# Altium PCB OLED_1.5-inch_Pcb.PcbDoc
Units mil, origin at the board's own origin, x right, y up, seen from the top; angles counter-clockwise.
Board outline 1811.02 x 1417.32 mil, 2 copper layers (Top Layer, Bottom Layer), stack 49.606 mil thick; 24 components, 17 nets, 99 pads, 7 vias.
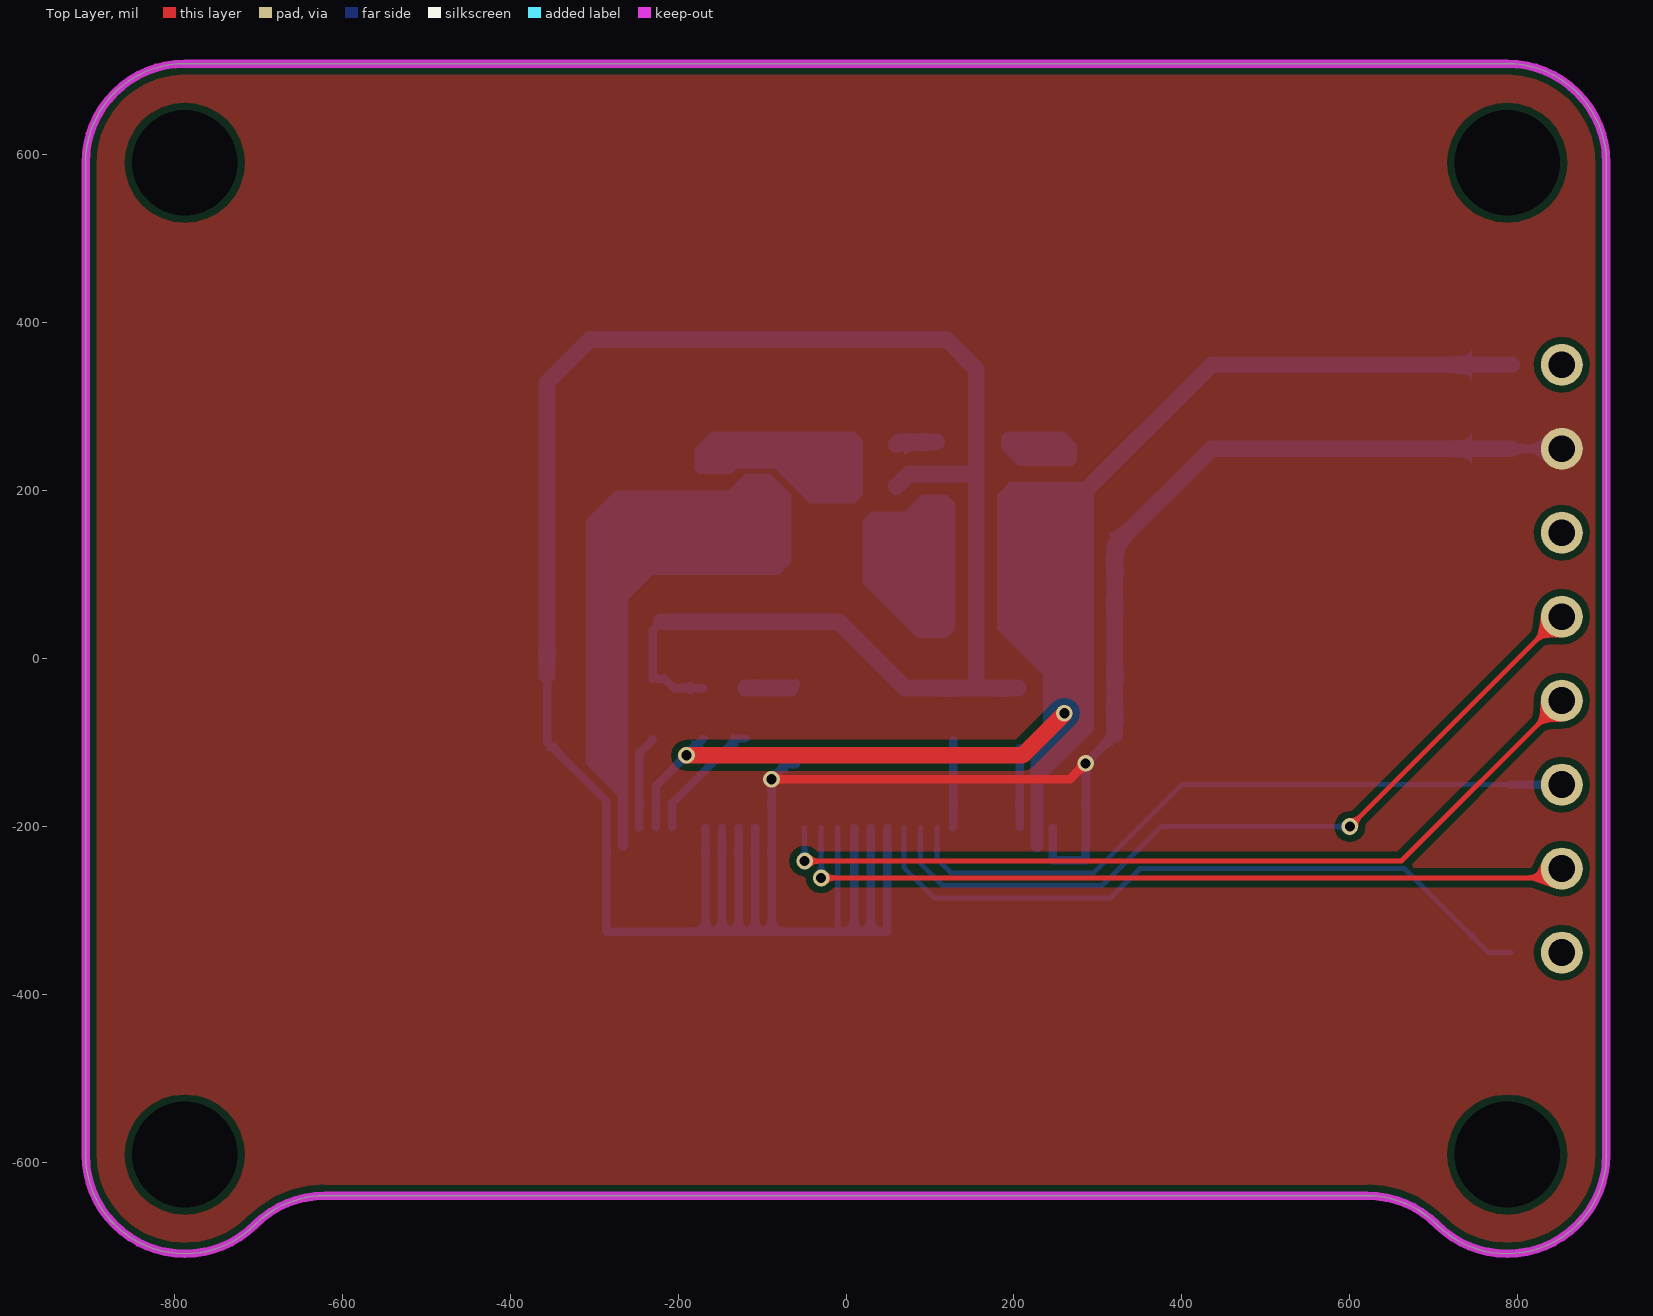
[diagram p0: Top Layer view]
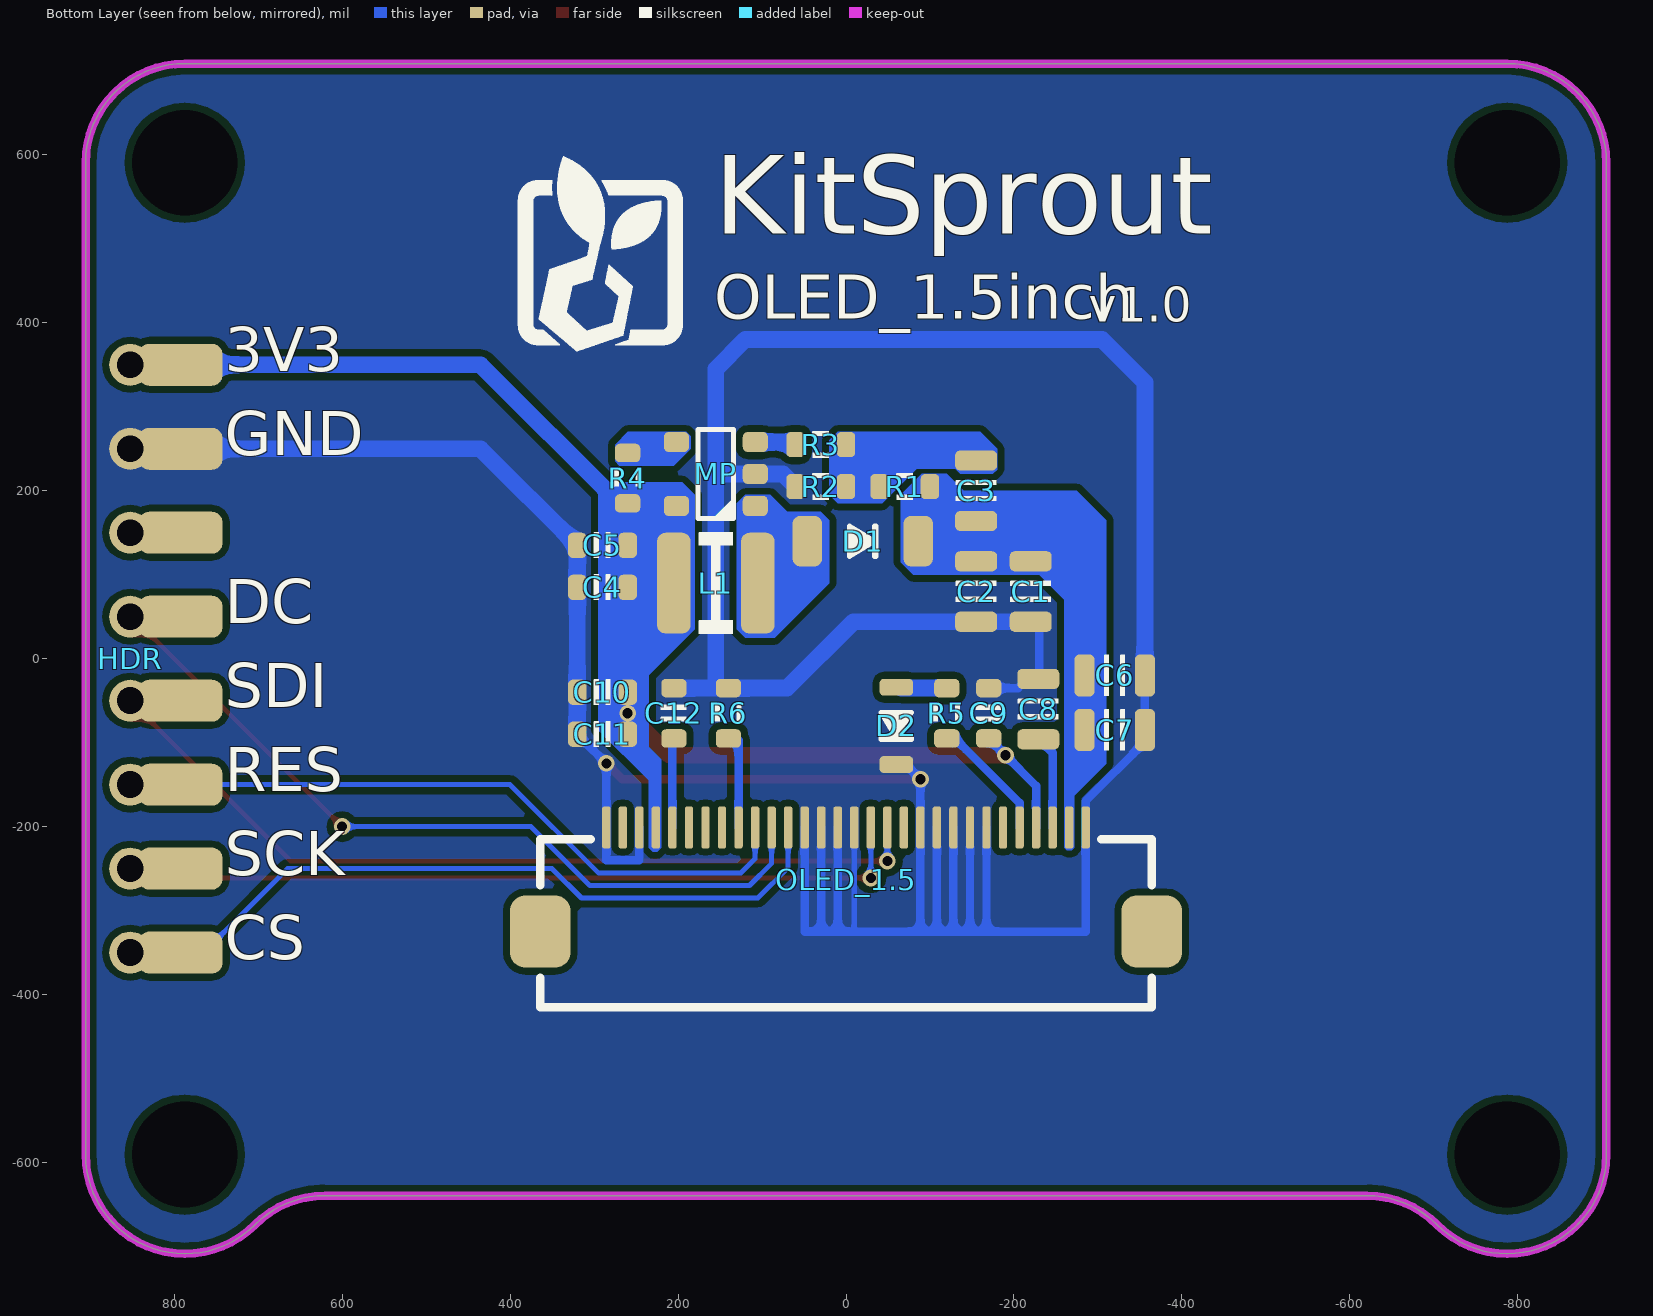
[diagram p1: Bottom Layer view, seen from below]
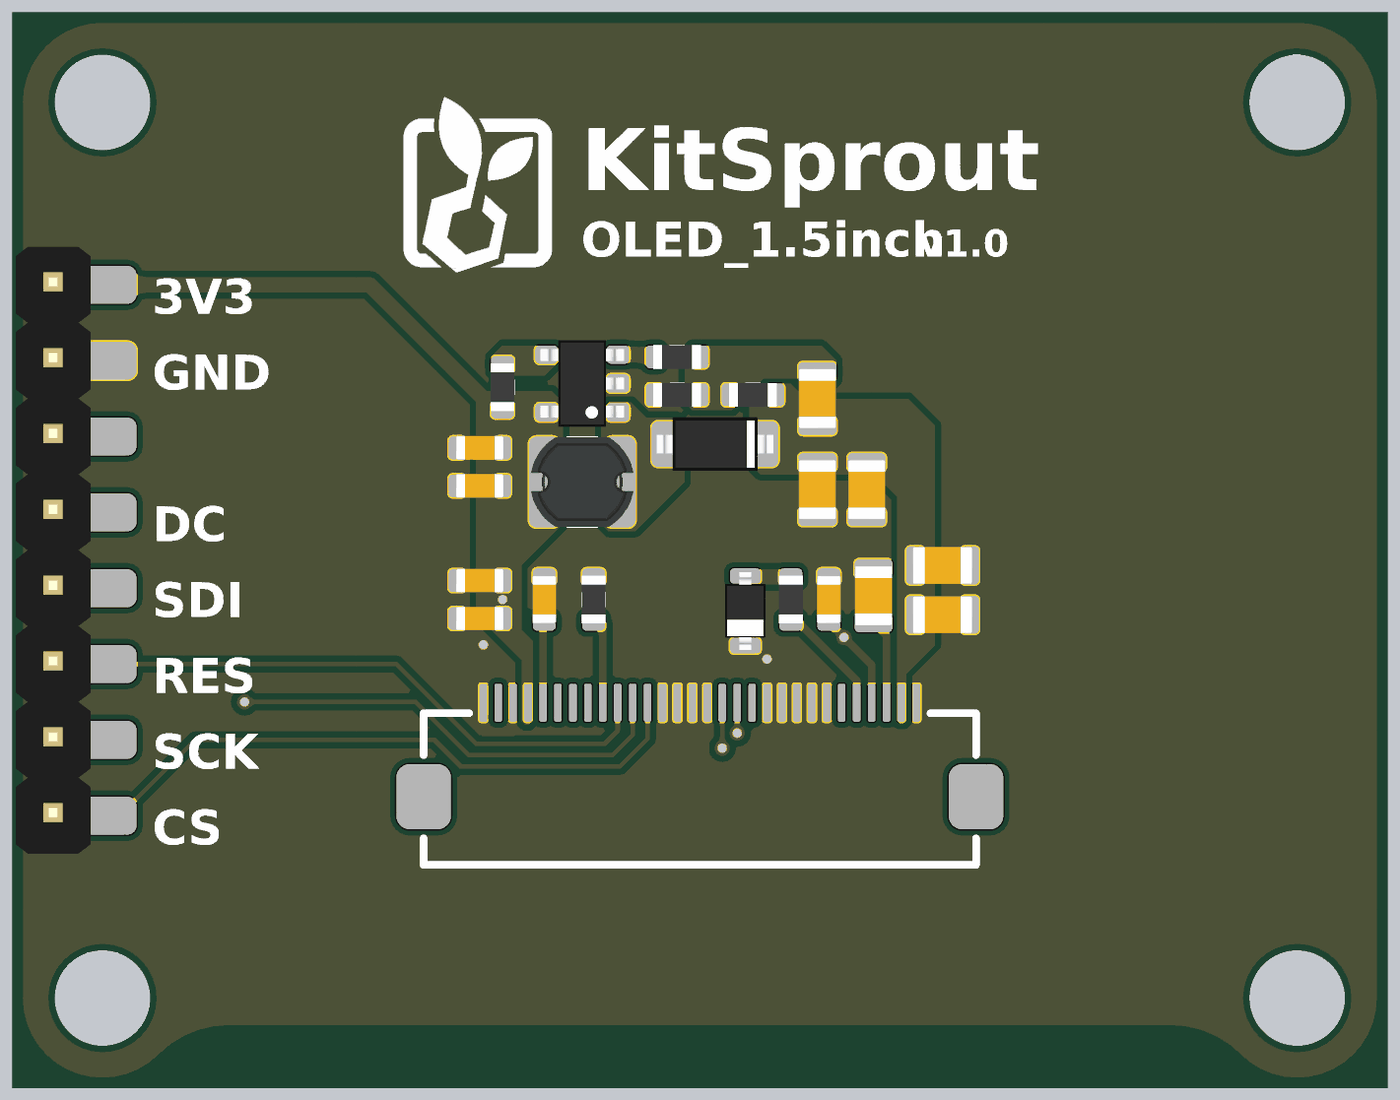
[diagram p2: 3D render of the assembled board from below, using the file's embedded part models]

## Layer stack, top to bottom
Top Solder: solder mask 0.3937, Solder Resist, Dk 3.5
Top Layer: signal copper 1.1811
Dielectric 1: dielectric 47.2441, FR-4, Dk 4.8
Bottom Layer: signal copper 1.1811
Bottom Solder: solder mask 0.3937, Solder Resist, Dk 3.5

## Board outline
-905.51,-590.55 ccw(c-787.4,-590.55) -787.4,-708.66 ccw(c-787.4,-590.55) -703.89,-674.07 cw(c-620.37,-757.58) -620.37,-639.47 620.37,-639.47 cw(c620.37,-757.58) 703.89,-674.07 ccw(c787.4,-590.55) 787.4,-708.66 ccw(c787.4,-590.55) 905.51,-590.55 905.51,590.55 ccw(c787.4,590.55) 787.4,708.66 -787.4,708.66 ccw(c-787.4,590.55) -905.51,590.55

## Design rules (kind name [scope] priority, off if disabled: settings)
BoardOutlineClearance [All] p1: gap=10 ignorepadtopadclearanceinfootprint=FALSE except(0: Arc-SplitContinuation Track-SplitContinuation SMDPad-SplitContinuation THPad-SplitContinuation Via-SplitContinuation Fill-SplitContinuation Poly-SplitContinuation Region-SplitContinuation Text-SplitContinuation)
Clearance ClearancePolygon [InPolygon] p1: gap=8 ignorepadtopadclearanceinfootprint=FALSE except(0: Arc-Hole Track-Hole SMDPad-Hole THPad-Hole Via-Hole Fill-Hole Poly-Hole Region-Hole Text-Hole)
Clearance [All] p2: gap=6 ignorepadtopadclearanceinfootprint=FALSE except(0: Arc-Hole Track-Hole SMDPad-Hole THPad-Hole Via-Hole Fill-Hole Poly-Hole Region-Hole Text-Hole)
ComponentClearance [All] p1: gap=0 collisioncheckmode=3 verticalgap=0 showdistances=FALSE
Height [All] p1: minheight=0 maxheight=5000 prefheight=500
HoleSize [All] p1: absolutevalues=TRUE maxlimit=200 minlimit=1 maxpercent=80.000 minpercent=20.000
HoleToHoleClearance [All] p1: gap=6 allowstackedmicrovias=TRUE
MinimumAnnularRing [All] p1: minimumring=4
MinimumSolderMaskSliver [All] p1: minsoldermaskwidth=0
PolygonConnect [All] p1: connectstyle=Direct reliefconductorwidth=10 reliefentries=4 polygonreliefangle="90 Angle" airgapwidth=10
RoutingVias [All] p1: holewidth=12 width=24 viastyle="Through Hole" minholewidth=12 minwidth=20 maxholewidth=28 maxwidth=50
SilkToSilkClearance [All] p1: silktosilkclearance=0
SilkToSolderMaskClearance [IsPad] p1: minsilkscreentomaskgap=0 clearancetoexposedcopper=TRUE
SolderMaskExpansion [All] p1: expansion=2
Width [All] p1: maxlimit=100 minlimit=6 preferedwidth=10
23 further rules are at their usual default settings.

## Components (designator, comment, footprint, x,y, rotation, side; value= is the part's Value field where it differs from the comment)
C1 "Cap_0805" CAP_0805 -220,80 r90 bottom value=10u
C2 "Cap_0805" CAP_0805 -155,80 r90 bottom value=1u
C3 "Cap_0805" CAP_0805 -155,200 r270 bottom value=0.1u
C4 "Cap_0603" CAP_0603 290,85 r180 bottom value=0.1u
C5 "Cap_0603" CAP_0603 290,135 r180 bottom value=10u
C6 "Cap_0805" CAP_0805 -320,-20 r0 bottom value=4.7u
C7 "Cap_0805" CAP_0805 -320,-85 r0 bottom value=0.1u
C8 "Cap_0805" CAP_0805 -229,-60 r270 bottom value=4.7u
C9 "Cap_0603" CAP_0603 -170,-65 r270 bottom value=10u
C10 "Cap_0603" CAP_0603 290,-40 r180 bottom value=4.7u
C11 "Cap_0603" CAP_0603 290,-90 r180 bottom value=1u
C12 "Cap_0603" CAP_0603 205,-65 r270 bottom value=0.1u
D1 "Diode" SOD-123 -20,140 r180 bottom value=1N5819
D2 "Diode" SOD-323 -60,-80 r270 bottom value=1N4148
HDR "HDR1x8_2.54" HDR1X8_2.54_180 852.4,350 r180 bottom
L1 "Ind_CD32" IND_CD32 155,90 r0 bottom value=10u
MP "MP1541" SOT23-5 155,220 r0 bottom
OLED_1.5 "OLED_1.5_SSD1351" OLED_1.5_128x128_SSD1351 0,39.37 r0 top locked
R1 "Res_0603" RES_0603 -70,205 r180 bottom value=100K
R2 "Res_0603" RES_0603 30,205 r180 bottom value=13K
R3 "Res_0603" RES_0603 30,255 r180 bottom value=100K
R4 "Res_0603" RES_0603 260,215 r270 bottom value=10K
R5 "Res_0603" RES_0603 -120,-65 r90 bottom value=50R
R6 "Res_0603" RES_0603 140,-65 r90 bottom value=560K

## Footprints (in the part's own frame and the unit in brackets; to place one, negate y for a bottom-side part, rotate by r counter-clockwise, add the part's x,y. Pads: shape width x height; smd on the part's side, far side on the other; paste and mask are expansions set on the pad)
CAP_0603 [mil]
  rrect50% 22x30 smd: 1(-30,0) 2(30,0)
  silkscreen extent -10,-15 10,15, body extent -31,-16 31,16, height 31
CAP_0805 [mil]
  rrect50% 24x50 smd: 1(-36,0) 2(36,0)
  silkscreen extent -12,-24 12,24, body extent -39,-25 39,25, height 39
HDR1X8_2.54_180 [mil]
  round 50 hole 32: 1(0,0) 2(0,-100) 3(0,-200) 4(0,-300) 5(0,-400) 6(0,-500) 7(0,-600) 8(0,-700)
  body extent -49,-750 49,50, height 323
IND_CD32 [mil]
  rrect50% 40x120 smd: 1(-50,0) 2(50,0)
  silkscreen extent -20,-60 20,60, body extent -68,-59 68,59, height 83
OLED_1.5_128x128_SSD1351 [mil]
  rrect50% 72x86 smd far side: 0(-364.06,-364.37) 0(364.05,-364.37)
  rrect50% 10x50 smd far side: 1(-285.43,-240.39) 2(-265.75,-240.39) 3(-246.06,-240.39) 4(-226.38,-240.39) 5(-206.69,-240.39) 6(-187.01,-240.39) 7(-167.32,-240.39) 8(-147.64,-240.39) 9(-127.95,-240.39) 10(-108.27,-240.39) 11(-88.58,-240.39) 12(-68.9,-240.39) 13(-49.21,-240.39) 14(-29.53,-240.39) 15(-9.84,-240.39) 16(9.84,-240.39) 17(29.53,-240.39) 18(49.21,-240.39) 19(68.9,-240.39) 20(88.58,-240.39) 21(108.27,-240.39) 22(127.95,-240.39) 23(147.64,-240.39) 24(167.32,-240.39) 25(187.01,-240.39) 26(206.69,-240.39) 27(226.38,-240.39) 28(246.06,-240.39) 29(265.75,-240.39) 30(285.43,-240.39)
  body extent -669,-669 669,669, height 63
RES_0603 [mil]
  rrect50% 22x30 smd: 1(-30,0) 2(30,0)
  silkscreen extent -10,-16 10,16, body extent -31,-16 31,16, height 18
SOD-123 [mil]
  rrect50% 35x60 smd: 1(-66,0) 2(66,0)
  silkscreen extent -16,-18 16,18, body extent -77,-35 77,35, height 46
SOD-323 [mil]
  rrect50% 20x40 smd: 1(-46,0) 2(46,0)
  silkscreen extent -16,-18 16,18, body extent -51,-27 51,27, height 43
SOT23-5 [mil]
  rrect50% 30x24 smd: 1(-47,38) 2(-47,0) 3(-47,-38) 4(47,-38) 5(47,38)
  silkscreen extent -21,-53 21,53, body extent -55,-57 55,57, height 57

## Part data
C1 C2 C3 C4 C5 C6 C7 C8 C9 C10 C11 C12: "Capacitor"
D1: library part Diode_SOD123
D2: library part Diode_SOD323
HDR: "Header"
L1: "Inductor"
MP: "Boost"
OLED_1.5: "OLED"
R1 R2 R3 R4 R5 R6: "Resistor"

## Free pads (board coordinates)
  round 114.17 hole 126 unplated paste+0 mask+0: 0(-787.4,-590.55) 0(-787.4,590.55) 0(787.4,-590.55) 0(787.4,590.55)
  rrect50% 100x50 smd far side: 1(792.4,350) 2(792.4,250) 3(792.4,150) 4(792.4,50) 5(792.4,-50) 6(792.4,-150) 7(792.4,-250) 8(792.4,-350)

## Via types
v1: diameter 20, hole 12, Top Layer to Bottom Layer, 7 vias

## Nets (pads, with @x,y where several pads share a name; then routed paths per layer and width w, separated by ;. In a path a pad name is that pad's centre, name@x,y a point inside that pad or via, vN(x,y) a via of type N, cw(c..) or ccw(c..) an arc to the next point about the centre after c; other vN are vias at no path point)
3V3: C4.2 C5.2 C9.2 C10.2 C11.2 HDR.1 L1.2 MP.5 OLED_1.5.4 OLED_1.5.27 pad.1 R4.2 | length 1712.3
  Top Layer w20: v1(-190,-115) 210,-115 v1(260,-65)
  Bottom Layer w10: OLED_1.5.4 -226.38,-151.38 v1(-190,-115) C9.2 ; OLED_1.5.27 226.38,-128.62 C11.2@262.5,-92.5
  Bottom Layer w20: MP.5@202,185 R4.2 ; L1.2@205,85 C4.2 ; C11.2 v1(260,-65) C10.2 C4.2 ; pad.1 435,350 270,185 R4.2 ; C4.2 C5.2 R4.2
CS: HDR.8 OLED_1.5.19 pad.8 | length 842.3
  Bottom Layer w6: OLED_1.5.19 68.9,-248.9 105,-285 315,-285 350,-250 665,-250 765,-350 pad.8
DC: HDR.4 OLED_1.5.20 pad.4 | length 949.9
  Top Layer w6: v1(600,-200) 850,50 HDR.4
  Bottom Layer w6: OLED_1.5.20 88.58,-243.58 115,-270 305,-270 375,-200 v1(600,-200)
GND: C1.1 C2.1 C4.1 C5.1 C6.1 C7.1 C8.1 C9.1 C10.1 C11.1 C12.1 D2.2 HDR.2 MP.2 OLED_1.5.1 OLED_1.5.7 OLED_1.5.8 OLED_1.5.9 OLED_1.5.10 OLED_1.5.11 OLED_1.5.15 OLED_1.5.16 OLED_1.5.17 OLED_1.5.18 OLED_1.5.28 OLED_1.5.30 pad.2 R2.1 R6.2 | length 5278.8
  Top Layer w10: v1(-88.58,-143.58) 266.42,-143.58 v1(285.43,-124.57)
  Bottom Layer w6: -9.84,-325 OLED_1.5.15
  Bottom Layer w10: C6.1 -356,-99 -285.43,-169.57 OLED_1.5.1 -285.43,-325 -167.32,-325 ; C1.1 -230,34 -230,-24 -216,-24 -205,-35 C9.1 ; OLED_1.5.7 -167.32,-325 ; OLED_1.5.8 -147.64,-325 ; OLED_1.5.9 -127.95,-325 ; OLED_1.5.10 -108.27,-325 ; D2.2 -71,-126 v1(-88.58,-143.58) OLED_1.5.11 -88.58,-325 ; OLED_1.5.16 9.84,-325 ; OLED_1.5.17 29.53,-325 ; OLED_1.5.18 49.21,-325 29.53,-325 ; OLED_1.5.28 246.06,-240 285.43,-240 OLED_1.5.30 v1(285.43,-124.57) C11.1 ; pad.2 HDR.2 ; -167.32,-325 -147.64,-325 ; -147.64,-325 -127.95,-325 ; -127.95,-325 -108.27,-325 ; -108.27,-325 -88.58,-325 ; -88.58,-325 -9.84,-325 9.84,-325 ; 9.84,-325 29.53,-325
  Bottom Layer w20: C6.1 -356,329 -305,380 120,380 155,345 155,220 ; C1.1 -9,44 70,-35 R6.2 155,-35 ; R2.1 75,220 155,220 ; C12.1 155,-35 ; C11.1 C10.1 C4.1 C5.1 435,250 pad.2 ; 155,-35 155,220
NetC3_1: C3.1 R1.1 R2.2 R3.2 | length 217.8
  Bottom Layer w20: C3.1 -71,236 R1.1 R2.2 R3.2
NetC8_2: C8.2 OLED_1.5.3 | length 111.7
  Bottom Layer w10: OLED_1.5.3 -246.06,-112.06 C8.2@-230,-96
NetC12_2: C12.2 OLED_1.5.26 | length 94.3
  Bottom Layer w10: OLED_1.5.26 206.69,-106.69
NetD1_1: D1.1 L1.1 MP.1 | length 102.2
  Bottom Layer w20: D1.1 105,140 105,179 MP.1
NetD2_1: D2.1 R5.2 | length 62.5
  Bottom Layer w10: D2.1@-66,-35 D2.1@-60,-29
  Bottom Layer w20: R5.2 D2.1@-66,-35
NetMP_3: MP.3 R3.1 | length 49.2
  Bottom Layer w20: R3.1 63,258 MP.3
NetMP_4: MP.4 R4.1 | length 63.4
  Bottom Layer w20: MP.4 247,258 R4.1
NetOLED_1.5_5: OLED_1.5.5 R5.1 | length 147.8
  Bottom Layer w10: OLED_1.5.5 -206.69,-171.69 -130,-95 R5.1
NetOLED_1.5_22: OLED_1.5.22 R6.1 | length 104
  Bottom Layer w10: OLED_1.5.22 R6.1@127.95,-97.05
RES: HDR.6 OLED_1.5.21 pad.6 | length 831.8
  Bottom Layer w6: OLED_1.5.21 108.27,-238.27 125,-255 295,-255 400,-150 pad.6
  Bottom Layer w10: pad.6 HDR.6
SCK: HDR.7 OLED_1.5.14 pad.7 | length 946.5
  Top Layer w6: v1(-29.53,-261.02) 841.38,-261.02 HDR.7
  Bottom Layer w6: v1(-29.53,-261.02) OLED_1.5.14
SDI: HDR.5 OLED_1.5.13 pad.5 | length 1020.7
  Top Layer w6: v1(-49.21,-241.02) 661.38,-241.02 HDR.5
  Bottom Layer w6: v1(-49.21,-241.02) OLED_1.5.13
VCC: C1.2 C2.2 C3.2 C6.2 C7.2 D1.2 OLED_1.5.2 R1.2 | length 626.7
  Bottom Layer w10: C7.2 -284,-101 -265.75,-119.25 OLED_1.5.2
  Bottom Layer w20: C7.2 -284,91 -259,116 C2.2 -155,140 ; C3.2 -155,140 ; R1.2 -86,191 D1.2 -155,140
pads on no net: HDR.3 OLED_1.5.0 OLED_1.5.6 OLED_1.5.12 OLED_1.5.23 OLED_1.5.24 OLED_1.5.25 OLED_1.5.29

## Polygon pours and split planes (outlines as drawn)
no net on Keep-Out Layer "Mechanical 1-No Net" (none): -905.51,-590.55 ccw(c-787.4,-590.55) -787.4,-708.66 ccw(c-787.4,-590.55) -703.89,-674.07 cw(c-620.37,-757.58) -620.37,-639.47 620.37,-639.47 cw(c620.37,-757.58) 703.89,-674.07 ccw(c787.4,-590.55) 787.4,-708.66 ccw(c787.4,-590.55) 905.51,-590.55 905.51,590.55 ccw(c787.4,590.55) 787.4,708.66 -787.4,708.66 ccw(c-787.4,590.55) -905.51,590.55
GND on Top Layer "GND_L01_P001" (solid, remove dead copper, pour order 1): -905.51,-590.55 ccw(c-787.4,-590.55) -787.4,-708.66 ccw(c-787.4,-590.55) -703.89,-674.07 cw(c-620.37,-757.58) -620.37,-639.47 620.37,-639.47 cw(c620.37,-757.58) 703.89,-674.07 ccw(c787.4,-590.55) 787.4,-708.66 ccw(c787.4,-590.55) 905.51,-590.55 905.51,590.55 ccw(c787.4,590.55) 787.4,708.66 -787.4,708.66 ccw(c-787.4,590.55) -905.51,590.55
GND on Bottom Layer "GND_L02_P000" (solid, remove dead copper, pour order 0): -905.51,-590.55 ccw(c-787.4,-590.55) -787.4,-708.66 ccw(c-787.4,-590.55) -703.89,-674.07 cw(c-620.37,-757.58) -620.37,-639.47 620.37,-639.47 cw(c620.37,-757.58) 703.89,-674.07 ccw(c787.4,-590.55) 787.4,-708.66 ccw(c787.4,-590.55) 905.51,-590.55 905.51,590.55 ccw(c787.4,590.55) 787.4,708.66 -787.4,708.66 ccw(c-787.4,590.55) -905.51,590.55

## Other copper
Bottom Layer:
  region net NetC3_1: -160,270 -180,250 -180,225 -175,220 -136,220 -130,226 -84,226 -43,185 10,185 20,195 20,260 10,270
  region net NetMP_4: 190,270 185,265 185,250 205,230 270,230 275,235 275,255 260,270
  region net VCC: -260,-225 -263,-228 -269,-228 -272,-225 -272,-163 -310,-125 -310,165 -275,200 -140,200 -120,220 -90,220 -65,195 -65,115 -80,100 -230,100 -260,70
  region net NetD1_1: 119.96,195 90,195 70,175 30,175 20,165 20,90 85,25 120,25 130,35 130,184.96
  region net 3V3: 220,-120 235,-105 235,-20 180,35 180,195 195,210 285,210 295,200 295,-85 235,-145 235,-225 230,-230 225,-230 220,-225

## Silkscreen, mask and mechanical layers (free items; w line width, h text height)
Bottom Overlay:
  drawing of 3459 lines, arcs and shapes, not listed
  text "KitSprout" at 156.64,475.2 h160
  text "v1.0" at -288.84,387.42 h70
  text "OLED_1.5inch" at 156.64,387.42 h90
  text "3V3" at 740,325 h90
  text "GND" at 740,225 h90
  text "DC" at 740,25 h90
  text "SDI" at 740,-75 h90
  text "RES" at 740,-175 h90
  text "SCK" at 740,-275 h90
  text "CS" at 740,-375 h90
Mechanical 1:
  lines w2: -905.51,-590.55 ccw(c-905.51,-590.55) -905.51,-590.55 ; -905.51,-590.55 ccw(c-787.4,-590.55) -787.4,-708.66 ccw(c-787.4,-590.55) -703.89,-674.07 cw(c-620.37,-757.58) -620.37,-639.47 620.37,-639.47 ; -905.51,-590.55 -905.51,590.55 cw(c-787.4,590.55) -787.4,708.66 787.4,708.66 cw(c787.4,590.55) 905.51,590.55 ; 620.37,-639.47 cw(c620.37,-757.58) 703.89,-674.07 ccw(c787.4,-590.55) 787.4,-708.66 ccw(c787.4,-590.55) 905.51,-590.55 905.51,590.55 ; 620.37,-639.47 620.37,-639.47 ; 905.51,590.55 ccw(c905.51,590.55) 905.51,590.55
T-Component:
  circle w2: c787.4,590.55 r118.11
  circle w2: c-787.4,590.55 r118.11
  circle w2: c-787.4,-590.55 r118.11
  circle w2: c787.4,-590.55 r118.11